# EAGLE board shield (EAGLE 7.6.0)

Size 100 x 80 mm. Coordinates in mm from the lower left corner, seen from the top.
Outline: 0,0 100,0 100,80 0,80 0,0
Copper layers (1*16): Top 0.035mm / dielectric 1.5mm / Bottom 0.035mm
Design rules "default": minimum track width 10mil, minimum drill 24mil, track to track 8mil, track to pad 8mil, pad to pad 8mil, via to via 8mil, smd to smd 8mil, copper to edge 40mil, drill to drill 8mil, minimum pad ring 10mil, minimum via ring 8mil, stop-mask expansion 4mil, vias tented up to drill 0mil, thermal gap 10mil

## Footprints (pad centres in the part's own frame; a part is rotated, then mirrored left to right if it is on the bottom)
DIL16 = drill 0.813 long: 1 -8.89,-3.81; 2 -6.35,-3.81; 3 -3.81,-3.81; 4 -1.27,-3.81; 5 1.27,-3.81; 6 3.81,-3.81; 7 6.35,-3.81; 8 8.89,-3.81; 9 8.89,3.81; 10 6.35,3.81; 11 3.81,3.81; 12 1.27,3.81; 13 -1.27,3.81; 14 -3.81,3.81; 15 -6.35,3.81; 16 -8.89,3.81
DIL14 = drill 0.813 long: 1 -7.62,-3.81; 2 -5.08,-3.81; 3 -2.54,-3.81; 4 0,-3.81; 5 2.54,-3.81; 6 5.08,-3.81; 7 7.62,-3.81; 8 7.62,3.81; 9 5.08,3.81; 10 2.54,3.81; 11 0,3.81; 12 -2.54,3.81; 13 -5.08,3.81; 14 -7.62,3.81
HC-SR04_FOOTPRINT = drill 0.9 pad 1.778: ECHO 0,1.27; TRIG 0,-1.27; VCC 0,-3.81 | drill 0.9 pad 1.778 square: GND 0,3.81
W237-102 = drill 1.194 long: 1 -2.5,-1.27; 2 2.5,-1.27
ARDUINOR3-BPLACE = drill 1 pad 1.676 octagon: 3V 35.56,2.54; 5V 38.1,2.54; A0 50.8,2.54; A1 53.34,2.54; A2 55.88,2.54; A3 58.42,2.54; A4 60.96,2.54; A5 63.5,2.54; AREF 23.876,50.8; D0 63.5,50.8; D1 60.96,50.8; D2 58.42,50.8; D3 55.88,50.8; D4 53.34,50.8; D5 50.8,50.8; D6 48.26,50.8; D7 45.72,50.8; D8 41.656,50.8; D9 39.116,50.8; D10 36.576,50.8; D11 34.036,50.8; D12 31.496,50.8; D13 28.956,50.8; GND 26.416,50.8; GND1 43.18,2.54; GND2 40.64,2.54; IOREF 30.48,2.54; RESERVED 27.94,2.54; RESET 33.02,2.54; SCL 18.796,50.8; SDA 21.336,50.8; VIN 45.72,2.54

## Placement (x,y rotation side)
IC1  L293D  [DIL16]  74.93,40.64 0 top
IC2  74HC00N  [DIL14]  44.45,40.64 0 top
J_ULTRASONIC_1  HC-SR04  [HC-SR04_FOOTPRINT]  87.63,25.4 0 top
J_ULTRASONIC_2  HC-SR04  [HC-SR04_FOOTPRINT]  74.93,25.4 0 top
J_ULTRASONIC_3  HC-SR04  [HC-SR04_FOOTPRINT]  62.23,25.4 0 top
MOTOR1  [W237-102]  48.26,25.4 0 top
MOTOR2  [W237-102]  38.1,25.4 0 top
U1  ARDUINOR3-BPLACE  [ARDUINOR3-BPLACE]  26.67,7.62 0 top

## Library data of the parts
IC1 = st-microelectronics; MPN: L293D; OC_FARNELL: 9589619; OC_NEWARK: 56P8249
IC2 = 74xx-eu
J_ULTRASONIC_1-J_ULTRASONIC_3 = HCSR04
MOTOR1 MOTOR2 = con-wago-500; MPN: 237-102; OC_FARNELL: unknown; OC_NEWARK: 70K9898
U1 = adafruit

## Nets
1-2EN: IC1.1 U1.D11
1A: IC1.2 U1.D13
2A: IC1.7 U1.D12
3-4EN: IC1.9 U1.D10
3A: IC1.10 U1.D9
3V: U1.3V
4A: IC1.15 U1.D8
9VCC: IC1.8 U1.VIN
GND: IC1.4 IC1.5 IC1.12 IC1.13 IC2.7 J_ULTRASONIC_1.GND J_ULTRASONIC_2.GND J_ULTRASONIC_3.GND U1.GND U1.GND1 U1.GND2
N$1: J_ULTRASONIC_1.TRIG U1.A0
N$2: J_ULTRASONIC_1.ECHO U1.A1
N$3: J_ULTRASONIC_2.TRIG U1.A2
N$4: J_ULTRASONIC_2.ECHO U1.A3
N$5: J_ULTRASONIC_3.TRIG U1.A4
N$6: J_ULTRASONIC_3.ECHO U1.A5
N$7: IC1.3 MOTOR1.1
N$8: IC1.6 MOTOR1.2
N$9: IC1.14 MOTOR2.1
N$10: IC1.11 MOTOR2.2
VCC: IC1.16 IC2.14 J_ULTRASONIC_1.VCC J_ULTRASONIC_2.VCC J_ULTRASONIC_3.VCC U1.5V

## Tracks (layer width: path | path; a pad name or v marks a point on that pad's centre or on a via)
1-2EN  (1 unrouted)
1A  (1 unrouted)
2A  (1 unrouted)
3-4EN  (1 unrouted)
3A  (1 unrouted)
4A  (1 unrouted)
9VCC  (1 unrouted)
GND  (10 unrouted)
N$1  (1 unrouted)
N$2  (1 unrouted)
N$3  (1 unrouted)
N$4  (1 unrouted)
N$5  (1 unrouted)
N$6  (1 unrouted)
N$7  (1 unrouted)
N$8  (1 unrouted)
N$9  (1 unrouted)
N$10  (1 unrouted)
VCC  (5 unrouted)